# Altium PCB IR_Sensor_PCB.PcbDoc
Units mm, origin at the board's own origin, x right, y up, seen from the top; angles counter-clockwise.
Board outline 45 x 30 mm, 2 copper layers (Top Layer, Bottom Layer); 11 components, 8 nets, 30 pads, 9 vias.
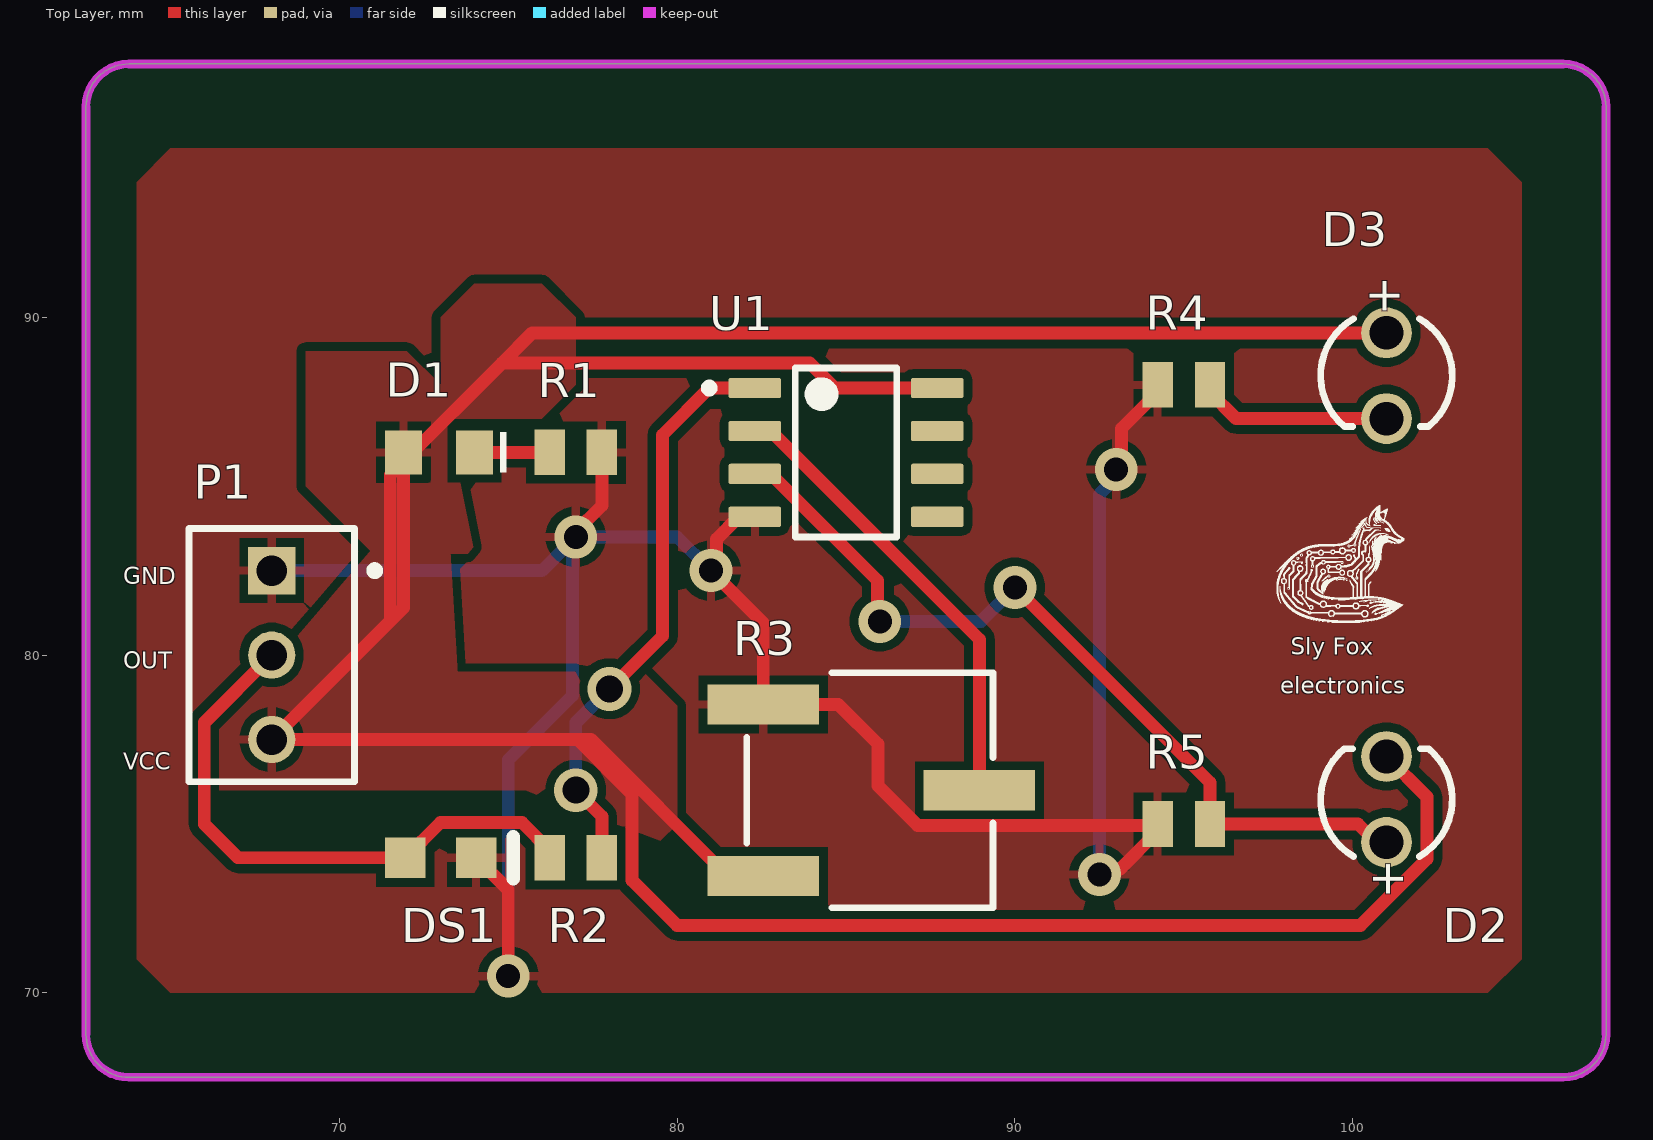
[diagram p0: Top Layer view]
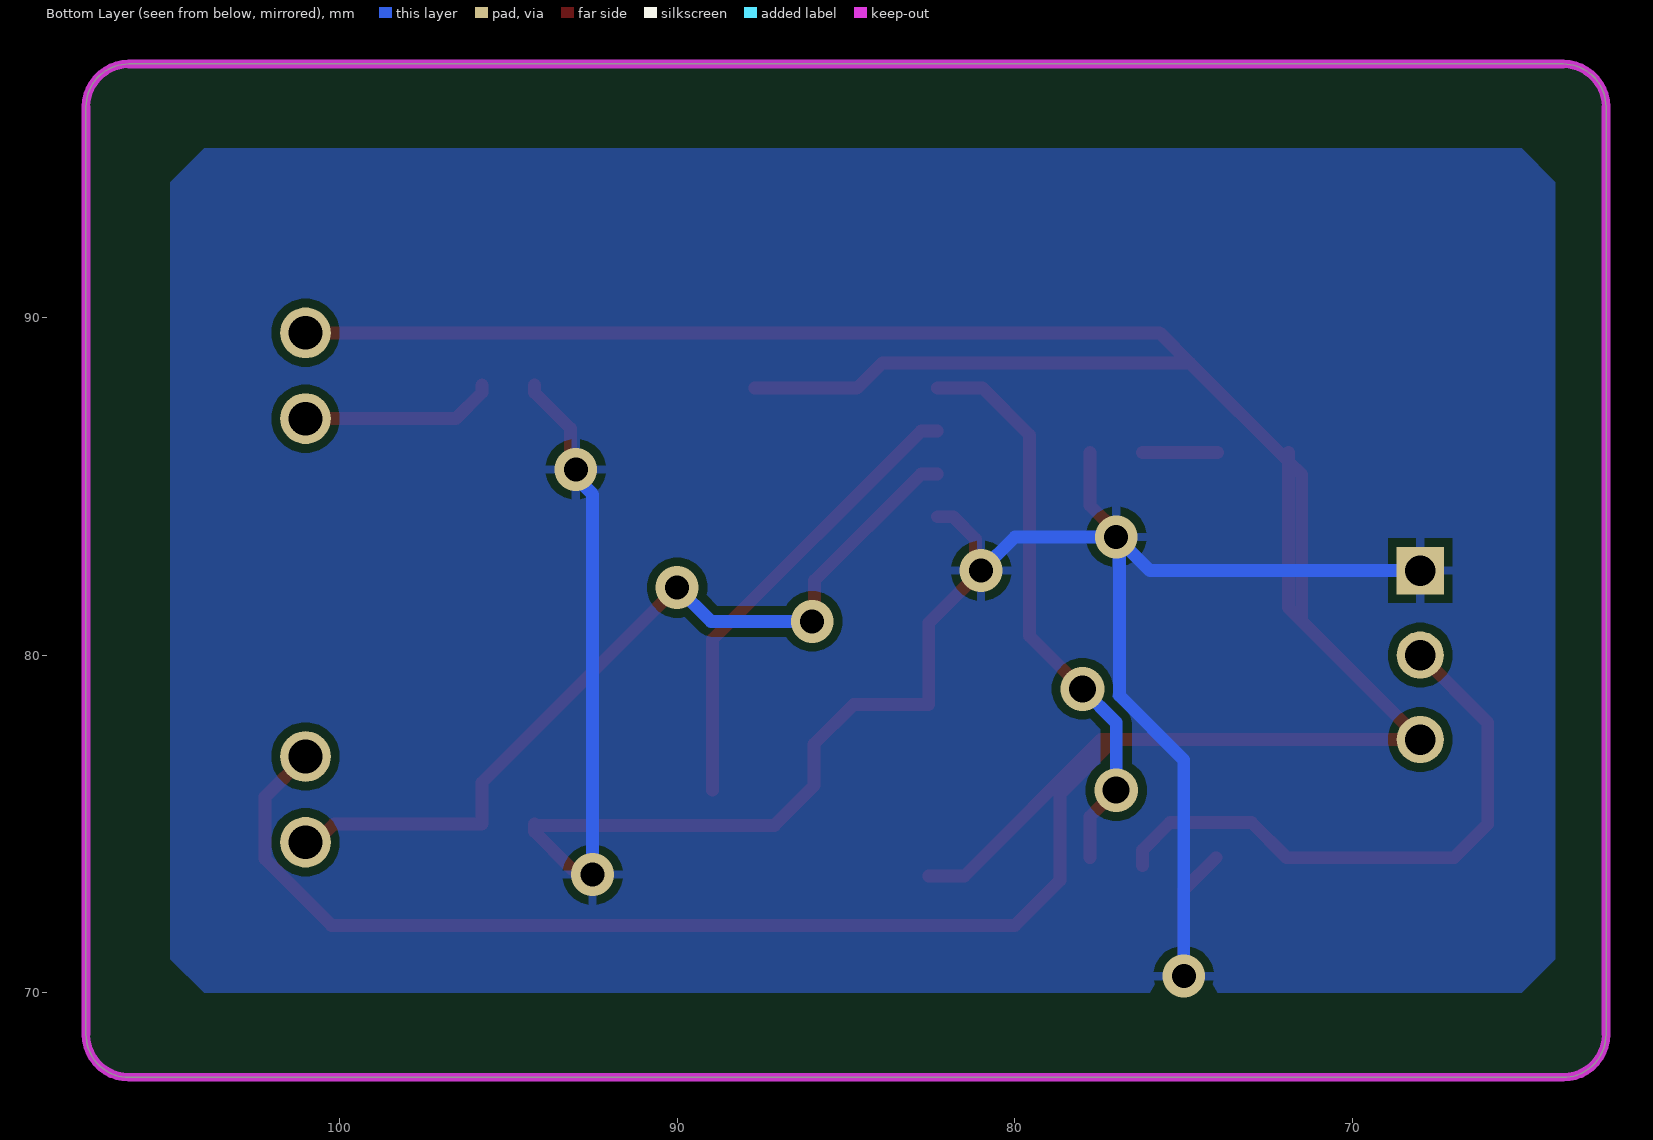
[diagram p1: Bottom Layer view, seen from below]
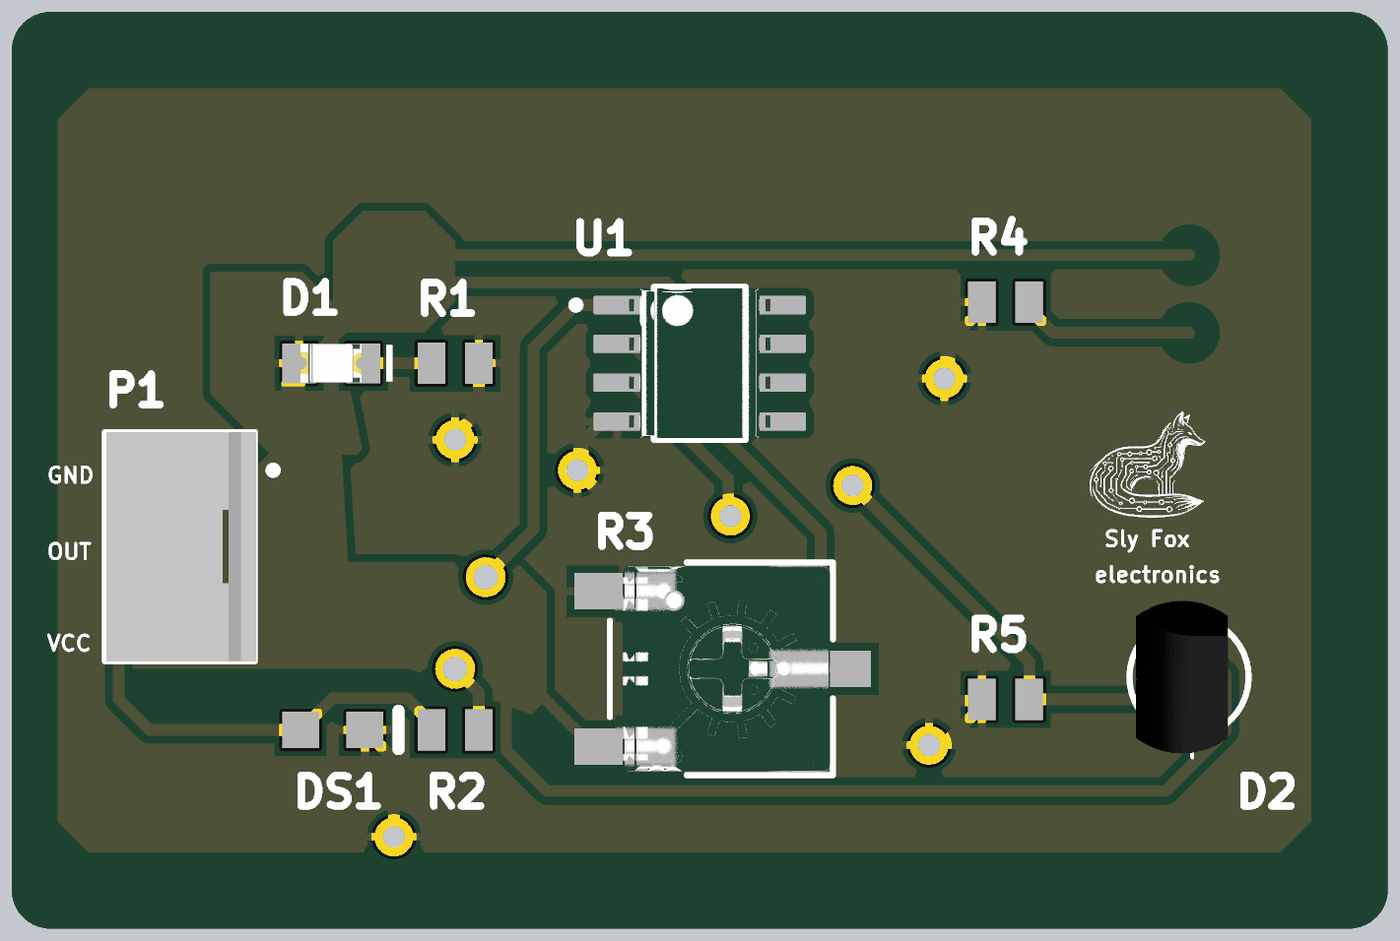
[diagram p2: 3D render of the assembled board from above, using the file's embedded part models]

## Layer stack, top to bottom
Top Solder: solder mask 0.0102, Solder Resist, Dk 3.5
Top Layer: signal copper 0.0356
Dielectric 1: dielectric 0.32, FR-4, Dk 4.8
Bottom Layer: signal copper 0.0356
Bottom Solder: solder mask 0.0102, Solder Resist, Dk 3.5

## Board outline
62.5,68.77 62.5,96.23 cw(c63.77,96.23) 63.77,97.5 106.23,97.5 cw(c106.23,96.23) 107.5,96.23 107.5,68.77 cw(c106.23,68.77) 106.23,67.5 63.77,67.5 cw(c63.77,68.77)

## Design rules (kind name [scope] priority, off if disabled: settings)
Clearance [All] p1: gap=0.254 ignorepadtopadclearanceinfootprint=FALSE
PolygonConnect [All] p1: connectstyle=Relief reliefconductorwidth=0.254 reliefentries=4 polygonreliefangle="90 Angle" airgapwidth=0.254
RoutingVias [All] p1: holewidth=1 width=1.3 viastyle="Through Hole" minholewidth=0.711 minwidth=1.27 maxholewidth=0.8 maxwidth=1.5
SilkToSilkClearance [All] p1: silktosilkclearance=0.1
SilkToSolderMaskClearance [IsPad] p1: minsilkscreentomaskgap=0.1 clearancetoexposedcopper=TRUE
SolderMaskExpansion [All] p1: expansion=0.102 istentingtop=FALSE
SupplyNets "Schematic Supply Nets_1" [InNet('GND')] p1: voltage=0.000
SupplyNets "Schematic Supply Nets" [InNet('+5')] p2: voltage=0.000
Width [All] p1: maxlimit=0.5 minlimit=0.254 preferedwidth=0.3
28 further rules are at their usual default settings.

## Components (designator, comment, footprint, x,y, rotation, side; value= is the part's Value field where it differs from the comment)
D1 "150080RS75000" WL-SMCW_0805_150080xx75000 72.95,86 r180 top
D2 "IR Receiver" IR_Receiver 101.635,75.603 r90 top
D3 "15400385A3590" WL-TIRW_D3.9H5.3 1371,-1181.73 r270 top
DS1 "HSMG-C170" AVAG-HSMX-C170_V 73,74 r0 top
P1 "171825-3" TECO-171825-3_V 68,80 r270 top
R1 "220" RESC2013X65X40LL15T20 77,86 r180 top
R2 "220" RESC2013X65X40LL15T20 77,74 r0 top
R3 "10k" FP-3361P-MFG 85.75,76 r270 top value=5kΩ
R4 "100" RESC2013X65X40LL15T20 95,88 r0 top
R5 "10k" RESC2013X65X40LL15T20 95,75 r0 top
U1 "LM358DR" FP-D0008A-MFG 85,86 r0 top

## Footprints (in the part's own frame and the unit in brackets; to place one, negate y for a bottom-side part, rotate by r counter-clockwise, add the part's x,y. Pads: shape width x height; smd on the part's side, far side on the other; paste and mask are expansions set on the pad)
AVAG-HSMX-C170_V [mm] "SMD, 2-Leads, Body 2x1.25mm, Height 0.8mm"
  rect 1.2x1.2 smd: 1(-1.05,0) 2(1.05,0)
  silkscreen extent 2.15,-0.63 2.15,0.63, body extent -1,-0.63 1,0.63, height 0.8
FP-3361P-MFG [mm]
  rect 1.19x3.3 smd paste+0 mask+0: 1(-2.54,-3.2) 2(0,3.2) 3(2.54,-3.2)
  silkscreen extent -3.48,-3.69 3.48,3.6, body extent -3.58,-4.95 3.58,4.95, height 0.25
FP-D0008A-MFG [mm]
  rrect17% 1.55x0.6 smd paste+0 mask+0: 1(-2.7,1.905) 2(-2.7,0.635) 3(-2.7,-0.635) 4(-2.7,-1.905) 5(2.7,-1.905) 6(2.7,-0.635) 7(2.7,0.635) 8(2.7,1.905)
  silkscreen extent -4.17,-2.5 1.5,2.5, body extent -3.57,-2.75 3.57,2.75, height 0.25
IR_Receiver [mm]
  round 1.5 hole 1: 1(1.397,0.635) 2(-1.143,0.635)
  silkscreen extent -1.56,-1.31 1.63,2.58, body extent -2.37,-0.64 2.63,2.36, height 6.9
RESC2013X65X40LL15T20 [mm] "Chip Resistor, 2-Leads, Body 2.00x1.30mm, IPC High Density"
  rect 0.9x1.35 smd: 1(-0.775,0) 2(0.775,0)
  body extent -1.07,-0.72 1.07,0.72, height 0.65
TECO-171825-3_V [mm] "Connector, 3-Leads, Body 4.9x7.5mm, Pitch 2.5mm"
  rect 1.4x1.4 hole 0.9: 1(-2.5,0)
  round 1.4 hole 0.9: 2(0,0) 3(2.5,0)
  silkscreen extent -3.75,-2.45 3.75,3.17, body extent -3.75,-2.4 3.75,2.5, height 10.4
WL-SMCW_0805_150080xx75000 [mm] "SMD Mono-color Chip LED, body 2.0x1.25mm"
  rect 1.1x1.3 smd: 1(-1.05,0) 2(1.05,0)
  silkscreen extent -2,-0.6 -1.8,0.6, body extent -1,-0.63 1,0.62, height 0.7
WL-TIRW_D3.9H5.3 [mm] "THT Infrared Round Waterclear, body diameter 3.9mm"
  round 1.5 hole 1: 1(-1268.73,-1270) 2(-1271.27,-1270)
  silkscreen extent -1271.69,-1271.95 -1268.5,-1268.05, body extent -1271.95,-1271.95 -1268.38,-1268.05, height 5.33

## Part data
D1: library part CMP-1426-00011-3, "LED Uni-Color Red 630nm 2-Pin Chip 0805(2012Metric) T/R", Case Code (Imperial)=0805, Case Code (Metric)=2012, Color=Red, Forward Current=100mA, Forward Voltage=2V, Max Junction Temperature (Tj)=95°C, Max Operating Temperature=85°C, Max Reverse Voltage (DC)=5V, Min Operating Temperature=-40°C, Power Dissipation=72mW, Test Current=20mA, Case/Package=0805, Dominant Wavelength=625nm, Height=700µm, Length=2mm, Lens Style="Clear, Rectangular", Luminous Intensity=150mcd, Mount="Surface Mount", Packaging="Tape and Reel", Peak Wavelength=630nm, REACH SVHC=Unknown, RoHS=Compliant, Viewing Angle=140°, Wavelength=625nm, Width=1.25mm
D2: library part IR_Receiver
D3: library part CMP-03913-82270983-1, "15400385A3590 WL-TIRW THT Infrared Round Waterclear", Forward Current=1A, Forward Voltage=1.5V, Max Reverse Voltage (DC)=5V, NexarPartId=82270983, Packaging=Bulk, Peak Wavelength=850nm, RoHS=Non-Compliant, Viewing Angle=35°, Wavelength=850nm
DS1: library part CMP-2000-05062-1, "Chip LED, Green, 2.2 V, -40 to 85 degC, 2-Pin SMD, Pb-Free, Tape and Reel", Forward Current If=20mA, Forward Voltage=2.2V, Forward Voltage VF Max=2.6V, LED Colour=Green, Manufacturer=Avago, Operating Temperature Max=85degC, Operating Temperature Min=-30degC, Operating Temperature Range=-30degCto+85degC, Opto Case Style=SMD, Package Description="2-Pin Surface Mount Device, Body 2 x 1.25 mm, Height 0.8 mm", Package Reference=HSMX-C170, Storage Temperature Min=-40degC, Bulb Size=1.25mmx1.4mm, Datasheet URL=https://datasheet.ciiva.com/29280/180495-da-01-en-chip-led-hsmg-c170-gelb-gruen-29280971.pdf, Datasheet Version=Oct-08, Dominant Wavelength=572nm, Dominant Wavelength Typ=572nm, External Depth=0.8mm, External Length / Height=2mm, External Width=1.25mm, Forward Current If Max=20mA, LED Mounting=SMD, LED Type=Standard, Lens Shape=Rectangular, Light Area Height=1mm, Luminous Intensity=15mcd, Luminous Intensity Min=4mcd, Luminous Intensity Typ=15mcd, Manufacturer URL=http://www.avagotech.com/, Mounting Type=SMD, MSL=MSL2A-4weeks, No. of Pins=2, Opto Mounting Orientation=Top, Packaging=CutTape, Peak Forward Current=20mA, Peak Wavelength=570nm, PIV Max=5V, Storage Temperature Max=85degC, SVHC=NoSVHC(16-Jun-2014), Viewing Angle=170deg, Voltage Vf Typ=2.2V, Wavelength Typ=570nm
P1: library part CMP-2000-07494-1, "Male Header, Pitch 2.5 mm, 1 x 3 Position, Height 10.4 mm, Tail Length 3.6 mm,  / -20 to 95 degC / , RoHS, Bulk", Colour=Natural, Contact Resistance=20mOhm, Flammability Rating=UL94V-0, Manufacturer="TE Connectivity", Max Current Rating=3.5A, Max Operating Temperature=95degC, Max Voltage Rating (AC)=250V, Max Voltage Rating (DC)=350.25kV, Min Operating Temperature=-20degC, Package Description="Male Header, Pitch 2.5 mm, 1 x 3 Position, Height 10.4 mm, Tail Length 3.6 mm", Package Quantity=1000, Voltage Rating=350V, Approvals=UL, Backwall/Post Interruptions=No(Without), Connector Type=Header, Contact Gender=Male, Contact Material=Brass, Contact Mating Length=0.295inch, Contact Plating=Tin, Contact Retention=No(Without), Contact Shape=Square, Datasheet URL=http://www.te.com/commerce/DocumentDelivery/DDEController?Action=showdoc&DocId=Customer+Drawing%7F171825%7FY3%7Fpdf%7FEnglish%7FENG_CD_171825_Y3.pdf%7F171825-3, Datasheet Version="Rev. Y3, 12/2016", Depth=4.9mm, Height=0.409inch, Housing Colour=Natural, Housing Material=Nylon, Length=7.5mm, Manufacturer URL=http://www.te.com/, Mating Alignment=Yes(With), Mating Post Length=7.5mm, Mating Retention=Yes(With), Mount=ThroughHole, Mounting Technology=ThroughHole, Number of Contacts=3, Number of Positions=3, Number of Rows=1, Orientation=Straight, Package Reference=171825-3, Packaging=Bag, Panel Mount Retention=No(Without), PCB Mount Alignment=No(Without), PCB Mount Retention=Without, PCB Mounting Orientation=Vertical, PCB Thickness=0.063inch, Pitch=2.5mm, Plating Thickness=0.8um, REACH SVHC=NoSVHC, RoHSCompliant=True, Strain Relief=No(Without), Tail Length=0.142inch, Termination=Solder
R1 R2 R4 R5: library part CMP-2000-07514-1, "Chip Resistor, 0 Ohm, 0.125 W, -55 to 125 degC, 0805 (2012 Metric), RoHS, Tape and Reel", Case Code (Imperial)=0805, Case Code (Metric)=2012, Manufacturer="TE Connectivity", Max Operating Temperature=125degC, Min Operating Temperature=-55degC, Number of Resistors=1, Package Description="2-Pin Surface Mount Device, Body 2 x 1.25 mm", Package Quantity=5000, Package Reference=RESC2013X65X40L15T20, Power Rating=125mW, Resistance=0mOhm, Tolerance=0%, Voltage Rating=150V, Case\/Package=0805, Composition=ThickFilm, Datasheet URL=www.te.com/commerce/DocumentDelivery/DDEController?Action=showdoc&DocId=Customer+Drawing%7F1623401%7FBA%7Fpdf%7FEnglish%7FENG_CD_1623401_BA.pdf%7F1623401-1, Datasheet Version="Rev. BA, 12/2009", Depth=1.25mm, ELV=Compliant, Height=0.55mm, Length=2mm, Manufacturer URL=http://www.te.com/, Mount=SurfaceMount, Mounting Technology=SurfaceMount, Number of Terminations=2, Packaging=TapeandReel, Radiation Hardening=No, RoHSCompliant=true, Termination=Solder, Weight=0.000194oz, Width=1.25mm
R3: library part CMP-07234-000005-1, "TRIMMER 5K OHM 0.5W GW TOP ADJ", Manufacturer=Bourns, Manufacturer Part Number=3361P-1-502GLF, Package=3361P, Power Rating=0.5W, Resistance=5kΩ, Temperature="-55°C to +125°C", Temperature Coefficient=100ppm/°C, Temperature Range High=+125°C, Temperature Range Low=-55°C, Tolerance=10%, Voltage Rating=300V, Automotive=No, Category=Res, ComponentLink2Description=Datasheet, ComponentLink2URL=https://www.bourns.com/docs/product-datasheets/3361.pdf?sfvrsn=3426000b_8, Composition=Cermet, Device Class L1="Passive Components", Device Class L2=Resistors, Device Class L3="Variable Resistors and Potentiometers", Digikey Description="TRIMMER 5K OHM 0.5W GW TOP ADJ", Height=5.84mm, Lead Free=Yes, Mouser Description="Trimmer Resistors - SMD 1/4\" SQ 5K 10% 0.5WATTS", Octopart=https://octopart.com/3361p-1-502glf-bourns-92301, RoHS=TRUE, Series=3361
U1: library part CMP-1685-00009-2, "IC OPAMP GP 2 CIRCUIT 8SOIC", Case/Package=SOIC, Dual Supply Voltage=9V, Input Bias Current=250nA, Input Offset Voltage (Vos)=7mV, Max Dual Supply Voltage=16V, Max Operating Temperature=70°C, Max Supply Voltage=32V, Min Dual Supply Voltage=1.5V, Min Operating Temperature=0°C, Min Supply Voltage=3V, Nominal Supply Current=1.2mA, Operating Supply Current=1mA, Output Current=30mA, Package Quantity=2500, Power Supply Rejection Ratio (PSRR)=65dB, Voltage Gain=100dB, Bandwidth=700kHz, Common Mode Rejection Ratio=65dB, Contact Plating=Gold, Gain Bandwidth Product=700kHz, Height=1.58mm, Lead Free="Lead Free", Length=4.9mm, Mount="Surface Mount", Number of Amplifiers=2, Number of Channels=2, Number of Circuits=2, Number of Elements=2, Number of Pins=8, Operating Supply Voltage=16V, Output Current per Channel=30mA, Packaging="Tape and Reel", Radiation Hardening=No, REACH SVHC="No SVHC", Slew Rate=0.3V/µs, Unity Gain Bandwidth Product=700kHz, Width=3.91mm

## Via types
v1: diameter 1.27, hole 0.711, Top Layer to Bottom Layer, 7 vias
v2: diameter 1.3, hole 0.8, Top Layer to Bottom Layer, 2 vias

## Nets (pads, with @x,y where several pads share a name; then routed paths per layer and width w, separated by ;. In a path a pad name is that pad's centre, name@x,y a point inside that pad or via, vN(x,y) a via of type N, cw(c..) or ccw(c..) an arc to the next point about the centre after c; other vN are vias at no path point)
+5: D1.2 D2.1 D3.2 P1.3 R3.3 U1.8 | length 117.4
  Top Layer w0.381: D1.2 D1.2@71.9,85.729 ; R3.3 81.495,73.46 77.455,77.5 P1.3 ; U1.8 84.67,87.905 83.926,88.65 74.821,88.65 ; D2.1 102.195,75.805 102.195,73.965 100.229,72 80,72 78.67,73.33 78.67,75.878 77.048,77.5 P1.3 ; D3.2 75.711,89.54 74.821,88.65 ; P1.3 71.508,81.008 ; 71.508,81.008 71.9,81.4 D1.2@71.9,85.729 ; 71.508,81.008 71.508,85.337 D1.2@71.9,85.729 ; D1.2@71.9,85.729 74.821,88.65
GND: DS1.2 P1.1 R1.1 R3.1 R4.1 R5.1 U1.4 | length 73
  Top Layer w0.381: DS1.2 75,73.05 v1(75,70.5) ; v1(77,83.5) 77,83.656 77.775,84.431 R1.1 ; U1.4 81.825,84.095 81.17,83.44 81.17,82.67 v1(81,82.5) 82.55,80.95 R3.1 84.772,78.54 85.944,77.368 85.944,76.133 87.116,74.961 94.186,74.961 R5.1 94.225,74.775 93.12,73.67 92.67,73.67 v1(92.5,73.5) ; v1(93,85.5) 93.156,85.656 93.156,86.706 94.225,87.775 R4.1
  Bottom Layer w0.381: P1.1 76,82.5 v1(77,83.5) ; v1(75,70.5) 75,76.898 76.905,78.804 76.905,83.405 v1(77,83.5) ; v1(81,82.5) 80,83.5 v1(77,83.5) ; v1(92.5,73.5) 92.5,84.759 93,85.259 v1(93,85.5)
NetD1_1: D1.1 R1.2 | length 2.2
  Top Layer w0.381: D1.1 R1.2
NetD2_2: D2.2 R5.2 U1.3 | length 25.4
  Top Layer w0.381: U1.3 82.775,85.365 85.934,82.207 85.934,81.067 v1(86,81) ; v1(90,82) 95.775,76.225 R5.2 100.157,75 100.697,74.46 D2.2
  Bottom Layer w0.381: v1(86,81) 89,81 v1(90,82)
NetD3_1: D3.1 R4.2 | length 5.8
  Top Layer w0.381: R4.2 95.775,87.775 96.55,87 D3.1
NetR2_2: R2.2 U1.1 | length 17.2
  Top Layer w0.381: v2(77,76) 77.775,75.225 R2.2 ; v2(78,79) 79.565,80.565 79.565,86.516 80.954,87.905 U1.1
  Bottom Layer w0.381: v2(77,76) 77,78 v2(78,79)
NetR3_2: R3.2 U1.2 | length 13.7
  Top Layer w0.381: U1.2 82.775,86.635 88.95,80.46 R3.2
output: DS1.1 P1.2 R2.1 | length 17.7
  Top Layer w0.381: P1.2 66,78 66,75 67,74 DS1.1 72.994,75.045 75.405,75.045 76.225,74.225 R2.1 R2.1@76.225,73.775
pads on no net: U1.5 U1.6 U1.7

## Polygon pours and split planes (outlines as drawn)
GND on Top Layer "NONET_L-01_P-001" (solid, remove dead copper, pour order 7): 105,94 104,95 65,95 64,94 64,71 65,70 104,70 105,71
+5 on Top Layer "NONET_L-01_P-001" (solid, remove dead copper, pour order 0): 64.857,76 73.138,85.661 73.707,76
+5 on Top Layer "NONET_L-01_P-001" (solid, remove dead copper, pour order 3): 72.5,78.5 73.5,79.5 79,79.5 80,78.5 80,75 79.5,74.5 75.5,76 72.5,76
+5 on Top Layer "NONET_L-01_P-001" (solid, remove dead copper, pour order 2): 76,91 77,90 77,88 76,87 73,87 73,90 74,91
+5 on Top Layer "NONET_L-01_P-001" (solid, remove dead copper, pour order 1): 74,83 71,83 69,85 69,89 72,89 73,88
GND on Bottom Layer "NONET_L-01_P-001" (solid, remove dead copper, pour order 6): 105,94 104,95 65,95 64,94 64,71 65,70 104,70 105,71

## Keep-outs
Keep-Out Layer:
  lines w0.254: 62.5,68.77 ccw(c63.77,68.77) 63.77,67.5 105,67.5 106.23,67.5 ccw(c106.23,68.77) 107.5,68.77 107.5,95 107.5,96.23 ccw(c106.23,96.23) 106.23,97.5 65,97.5 63.77,97.5 ccw(c63.77,96.23) 62.5,96.23 62.5,70.5 62.5,68.77

## Silkscreen, mask and mechanical layers (free items; w line width, h text height)
Top Overlay:
  drawing of 38 lines, arcs and shapes, not listed
  text "GND" at 63.6,82.1 h0.5
  text "Sly Fox" at 98.167,80.017 h0.5
  text "OUT" at 63.6,79.6 h0.5
  text "electronics" at 97.85,78.85 h0.5
  text "VCC" at 63.6,76.6 h0.5

## Text inside footprints (layer, text, board x,y; h text height)
D2: Top Overlay "+" at 101.5,72.78 h1.02 r90
D3: Top Overlay "+" at 100.5,91.22 h1.02 r270